# Altium PCB TIDA-010056.PcbDoc (part 4 of 4)
Units mil, origin at the board's own origin, x right, y up, seen from the top; angles counter-clockwise.
Board outline 2716.54 x 2756 mil, 4 copper layers (Top Layer, GND, PWR, Bottom Layer), stack 63.2 mil thick; 152 components, 93 nets, 418 pads, 601 vias.
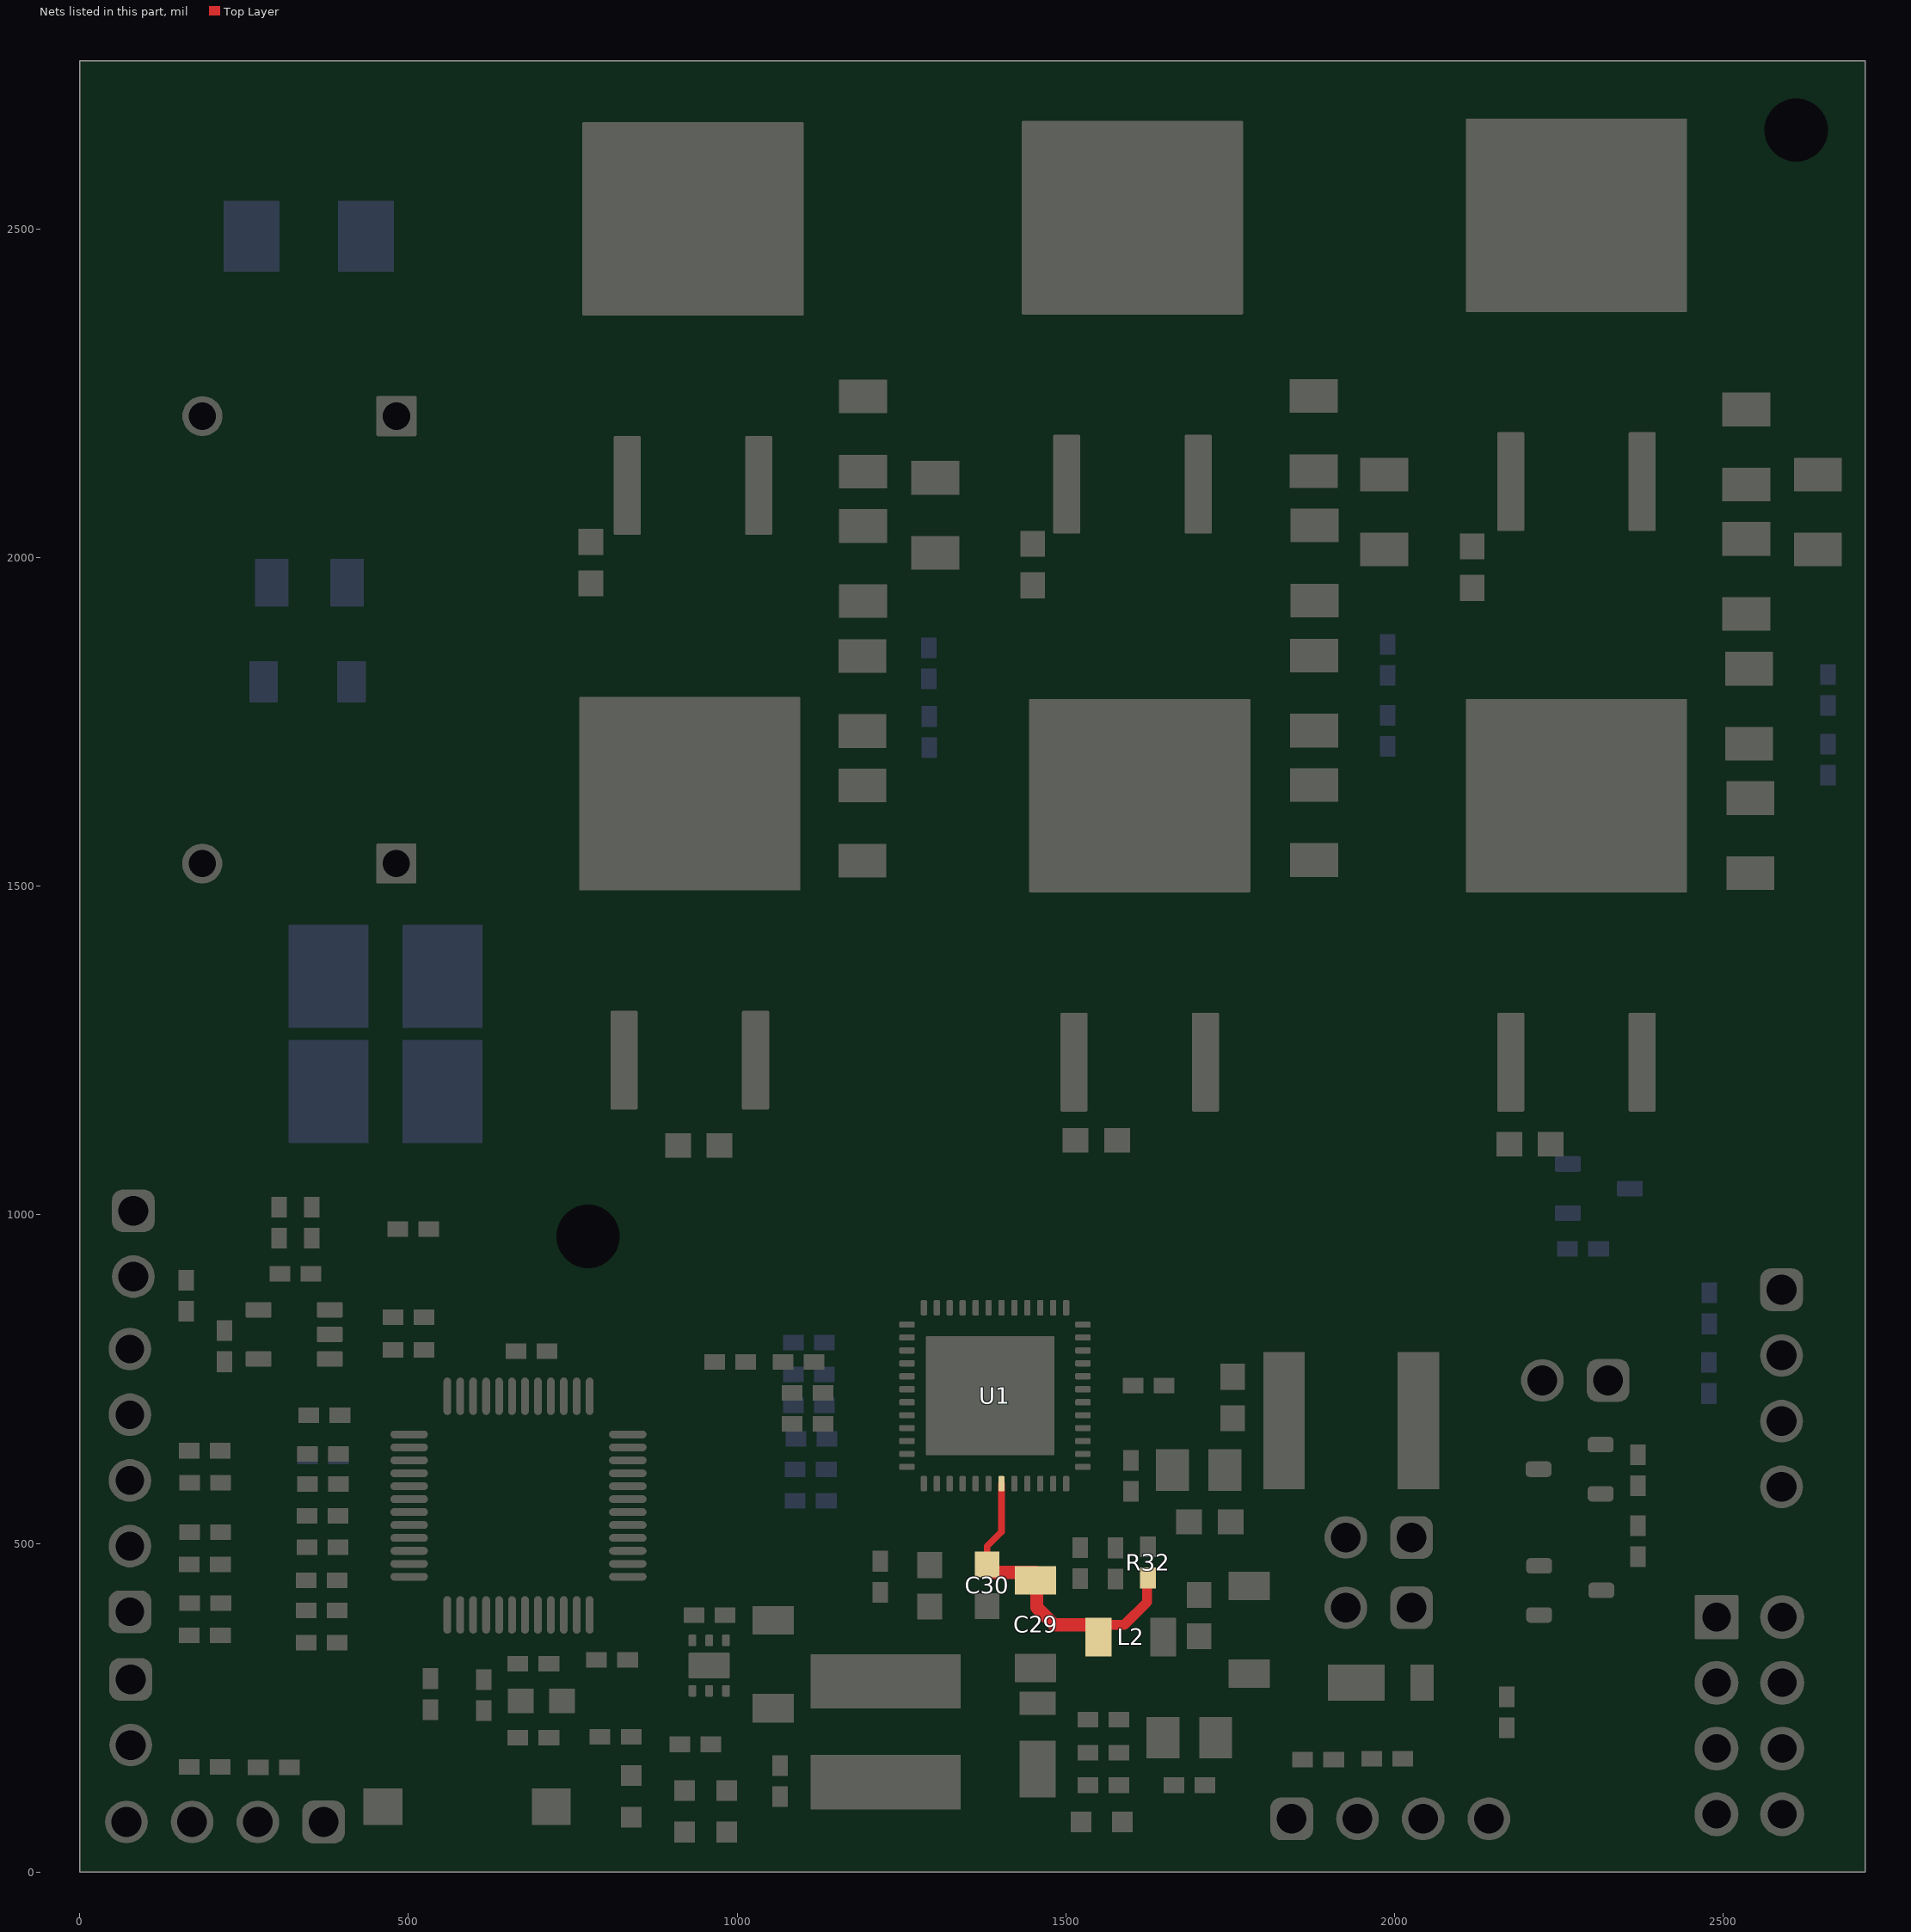
[diagram p5: the nets of this part, all layers, seen from the top]

## Via types
v1: diameter 24, hole 12, Top Layer to Bottom Layer, 476 vias
v2: diameter 20, hole 10, Top Layer to Bottom Layer, tented both sides, 108 vias
v3: diameter 19.68, hole 7.87, Top Layer to Bottom Layer, 14 vias
v4: diameter 200, hole 100, Top Layer to Bottom Layer, 3 vias

## Nets (pads, with @x,y where several pads share a name; then routed paths per layer and width w, separated by ;. In a path a pad name is that pad's centre, name@x,y a point inside that pad or via, vN(x,y) a via of type N, cw(c..) or ccw(c..) an arc to the next point about the centre after c; other vN are vias at no path point) (continued)
VIN: C29.1 C30.1 L2.2 R32.1 U1.43 | length 517.1
  Top Layer w10: C30.1@1380.47,467.69 1380.47,495.47 1402.13,517.13 U1.43@1402.13,590.82 ; R32.1@1623.84,445.88 R32.1@1623.84,447.87
  Top Layer w15: L2.2@1549.79,357.49 1549.79,376 1589,376 1623.84,410.84 R32.1@1623.84,445.88
  Top Layer w20: C30.1@1375.77,466.4 C30.1@1378.76,469.39 ; C30.1@1380.47,467.69 1392.16,456 1454,456 C29.1@1454,443.93 ; C29.1@1455.87,443.93 1455.87,402.62 1482.49,376 L2.2@1549.79,376
pads on no net: H1. H2. U1.12 U1.13 U1.22 U1.23 U1.24 U1.25 U1.26 U1.49@1323.08,666.41 U1.49@1323.08,724.68 U1.49@1323.08,782.94 U1.49@1384.89,666.41 U1.49@1384.89,724.68 U1.49@1384.89,782.94 U1.49@1446.7,666.41 U1.49@1446.7,724.68 U1.49@1446.7,782.94 U2.1 U2.2 U2.8 U2.10 U2.11 U2.16 U2.27 U2.28 U2.38 U2.40 U2.41 U2.44 U2.48 U3.2 U3.5

## Polygon pours and split planes (outlines as drawn)
GND on GND "GND-GND" (solid, pour order 4): 25.16,1022.16 46.65,1043 2639,1043 2674,1008 2674,59 2641,26 66,26 25.16,66.84
VDC on GND "Top Layer-VM" (solid, remove dead copper, pour order 84): 654,1485 678.9,1509.9 678.9,2252.58 730.31,2304 2667.11,2304 2683.13,2320.01 2683.13,2544.87 2505,2723 405,2723 376,2694 376,1575 466,1485
SHB on GND "GND-SHB" (solid, pour order 96): 1940.93,1485.99 1974.45,1519.51 1974.45,2213.51 1938.97,2248.99 1435.93,2248.99 1406.45,2219.52 1406.45,1520.2 1440.65,1485.99
SHA on GND "GND-SHA" (solid, pour order 100): 2632.98,1485.05 2664.45,1516.52 2664.45,2227.52 2643.91,2248.05 2076.98,2248.05 2037.45,2208.52 2037.45,1517.52 2069.92,1485.05
SHC on GND "GND-SHC" (solid, pour order 104): 1314.96,1486.02 1344.45,1515.51 1344.45,2218.44 1313.86,2249.02 787.96,2249.02 760.45,2221.52 760.45,1522.72 797.15,1486.02
GND on GND "Top Layer-GND" (solid, pour order 110): 419.26,1096 441,1110.29 441,1440 324,1557 324,2690 296,2718 49.82,2718 34,2702.18 34,1117 55,1096
SLA on GND "GND-SLA" (solid, pour order 116): 2654.78,1094.84 2679,1119.07 2679,1423.13 2660.13,1442 492.76,1442 488.5,1437.74 488.5,1108.6 502.26,1094.84
GND on GND "GND-GND 1" (solid, pour order 130): 34.69,1186.2 64.53,1216.04 64.53,1217.96 350.55,1217.96 383.45,1185.05 383.45,951.88 365.53,933.96 60.53,933.96 34.69,959.8
SHC on PWR "GND-SHC" (solid, pour order 172): 1318.96,1490.02 1348.45,1519.51 1348.45,2222.44 1317.86,2253.02 791.96,2253.02 764.45,2225.52 764.45,1526.72 801.15,1490.02
SHA on PWR "GND-SHA" (solid, pour order 170): 2636.98,1489.05 2668.45,1520.52 2668.45,2231.52 2647.91,2252.05 2080.98,2252.05 2041.45,2212.52 2041.45,1521.52 2073.92,1489.05
SHB on PWR "GND-SHB" (solid, pour order 168): 1944.93,1489.99 1978.45,1523.51 1978.45,2217.51 1942.97,2252.99 1439.93,2252.99 1410.45,2223.52 1410.45,1524.2 1444.65,1489.99
3.3V on PWR "PWR-3.3V" (solid, pour order 6): 36.87,822.35 63.52,849 988,849 1015.3,821.7 1015.3,52.3 992,29 63,29 20.51,71.49
VDC on PWR "Top Layer-VM" (solid, remove dead copper, pour order 86): 654.38,1485 679,1509.62 679,2253 730,2304 2667.11,2304 2681,2317.89 2681,2540 2498,2723 405,2723 376,2694 376,1575.57 466.57,1485
GND on PWR "Top Layer-GND" (solid, pour order 112): 419.26,1096 441,1110.29 441,1440 323,1558 323,2691 296,2718 49.82,2718 34,2702.18 34,1117 55,1096
SLA on PWR "PWR-SLA" (solid, pour order 118): 2662,1169 2679.95,1186.95 2679.95,1420.03 2657.98,1442 613,1442 597,1426 597,1185 613,1169
SLA on Bottom Layer "Bottom Layer-SLA" (solid, pour order 72): 2645.84,1094.84 2658,1107 2658,1432 2648,1442 492.76,1442 488.5,1437.74 488.5,1108.6 502.26,1094.84
VDC on Bottom Layer "Top Layer-VM" (solid, remove dead copper, pour order 88): 657.59,1485 679,1506.41 679,2254 729,2304 2667.11,2304 2682,2318.89 2682,2536 2495,2723 405,2723 376,2694 376,1570 461,1485
SHB on Bottom Layer "Bottom Layer-SHB" (solid, pour order 90): 1887.45,1496.52 1918.45,1527.51 1918.45,2226.52 1895.97,2248.99 1438.93,2248.99 1416.45,2226.51 1416.45,1523.52 1443.45,1496.51
SHA on Bottom Layer "Bottom Layer-SHA" (solid, pour order 92): 2580.45,1495.52 2602.45,1517.52 2602.45,2222.52 2580.45,2244.52 2091.45,2244.52 2061.45,2214.52 2061.45,1535.02 2100.96,1495.51
SHC on Bottom Layer "Bottom Layer-SHC" (solid, pour order 108): 1193.03,1495.51 1232.71,1535.19 1232.71,2219.26 1206.45,2245.51 787.52,2245.52 765.44,2223.44 765.47,1522.5 792.45,1495.52
GND on Bottom Layer "Top Layer-GND" (solid, pour order 114): 419.26,1096 441,1110.29 441,1433 324,1550 324,2689.38 295.38,2718 49.82,2718 34,2702.18 34,1117 55,1096
SLA on Bottom Layer "Bottom Layer-SLA 1" (solid, pour order 126): 2230.33,1026.88 2256.53,1000.69 2363.08,1000.69 2386.79,1024.39 2386.79,1159.01 2381.8,1164 2253.33,1164 2229.52,1140.19
GND on Bottom Layer "GND-GND" (solid, pour order 44): 25.16,1022.16 46.65,1043 2639,1043 2674,1008 2674,59 2641,26 66,26 25.16,66.84
GND on Bottom Layer "Bottom Layer-GND" (solid, pour order 128): 35.16,1183.24 65,1213.09 65,1215 351.02,1215 383.92,1182.1 383.92,948.92 366,931 61,931 35.16,956.84
VDC on Top Layer "Top Layer-SHB" (solid, pour order 174): 2677.13,2113.01 2683.13,2119.01 2683.13,2320.02 2678.13,2325.01 2616.13,2325.01 2611.38,2320.26 2611.38,2119.08 2617.45,2113.01
SHA on Top Layer "SHA_L01_P166" (solid, remove dead copper, pour order 166): 2118.02,1483.02 2447.21,1483.02 2462.07,1497.88 2462.07,2232.97 2449.01,2246.02 2258.96,2246.02 2236.45,2223.52 2237.45,2222.52 2237.45,2028.52 2186.45,1977.52 2109.94,1977.52 2099.45,1967.02 2099.45,1497.02
SHB on Top Layer "SHB_L01_P164" (solid, remove dead copper, pour order 164): 1449.02,1483.02 1778.21,1483.02 1793.07,1497.88 1793.07,2232.97 1778.04,2248 1591.93,2248 1567.45,2223.52 1568.45,2222.52 1568.45,2028.52 1517.45,1977.52 1440.94,1977.52 1430.45,1967.02 1430.45,1497.02
SHC on Top Layer "SHC_L01_P162" (solid, remove dead copper, pour order 162): 767.02,1486.02 1096.21,1486.02 1111.07,1500.88 1111.07,2235.97 1098.01,2249.02 907.96,2249.02 885.45,2226.52 886.45,2225.52 886.45,2031.52 838.45,1983.52 761.94,1983.52 750.45,1972.02 750.45,1498.52
GND on Top Layer "GND_L01_P160" (solid, remove dead copper, pour order 160): 1392.27,256.62 1412,239 1485,239 1485,333 1482,336 1453,336 1399.17,389.83 1399.17,424 1398.17,425 1363,425 1361,423 1361,369 1392.27,332
SLA on Top Layer "SLA_L01_P158" (solid, remove dead copper, pour order 158): 2613.45,2033.59 2682.85,2033.59 2683.13,1391.2 2672.71,1380.78 2523.77,1380.78 2505.45,1399.09 2505.45,1559.52 2516.71,1570.77 2589.71,1570.78 2613.45,1594.52
SLA on Top Layer "SLA_L01_P156" (solid, remove dead copper, pour order 156): 1948.45,2023.52 1958.52,2033.59 2000.62,2033.59 2008.45,2025.76 2008.45,1412.52 1987.45,1391.52 1854.45,1391.52 1841.45,1404.52 1841.45,1566.52 1856.45,1581.51 1928.03,1581.52 1948.45,1601.93
SLA on Top Layer "SLA_L01_P154" (solid, remove dead copper, pour order 154): 1265.13,2026.26 1271.46,2032.59 1331.38,2032.59 1339.45,2024.52 1339.45,1395.52 1334.45,1390.52 1175.45,1390.52 1138.45,1427.52 1138.45,1566.52 1152.45,1580.51 1246.28,1580.52 1265.13,1599.37
VDC on Top Layer "Top Layer-SHB" (solid, pour order 152): 1332.45,2098.01 1338.45,2104.01 1338.45,2313.52 1334.45,2317.52 1270.45,2317.51 1265.13,2312.2 1265.13,2105.65 1272.77,2098.01
VDC on Top Layer "Top Layer-SHB" (solid, pour order 148): 2014.77,2100.86 2020.77,2106.86 2020.76,2307.86 2015.77,2312.86 1953.77,2312.86 1949.02,2308.11 1949.02,2106.92 1955.08,2100.86
SHC on Top Layer "Top Layer-SHB" (solid, pour order 146): 1213.45,1824.35 1227.45,1838.35 1227.45,1948.79 1216.88,1959.35 1095.45,1959.35 1084.45,1948.35 1084.45,1831.99 1092.08,1824.35
SHA on Top Layer "Top Layer-SHB" (solid, pour order 144): 2561.44,1805.25 2575.44,1819.25 2575.44,1929.68 2564.87,1940.25 2443.44,1940.25 2432.44,1929.25 2432.44,1812.88 2440.07,1805.25
GND on Top Layer "Bottom Layer-GND" (solid, pour order 136): 33.26,1198.74 63.11,1228.58 63.11,1230.49 349.12,1230.49 442,1137.61 442,972 416.49,946.49 59.11,946.49 33.26,972.33
GND on Top Layer "GND-GND" (solid, pour order 134): 40.42,936.64 82.03,977 1189,977 1271.79,894.21 1271.79,455.48 857.07,40.76 81.26,40.76 40.42,81.6
SLA on Top Layer "Top Layer-SLA" (solid, pour order 132): 901.13,1424.51 917.77,1441.15 1323.5,1441.15 1340.13,1424.51 1340.13,1162.51 1328.77,1151.15 913.78,1151.15 901.13,1163.8
VDC on Top Layer "Top Layer-VM" (solid, remove dead copper, pour order 30): 617,1485 665.6,1533.6 665.6,2240.6 729,2304 2667.11,2304 2682.85,2319.74 2682.85,2540.15 2500,2723 405,2723 376,2694 376,1560 451,1485
GND on Top Layer "Top Layer-GND" (solid, pour order 32): 419.26,1096 441,1110.29 441,1426.09 323,1544.09 323,2691 296,2718 49.82,2718 34,2702.18 34,1117 55,1096
SLA on Top Layer "Top Layer-SLA" (solid, pour order 46): 2237.45,1428.52 2248.45,1439.51 2660.46,1439.52 2679.95,1420.03 2679.95,1157.03 2668.43,1145.51 2244.48,1145.52 2237.45,1152.55
SHB on Top Layer "Top Layer-SHB" (solid, pour order 34): 1900.45,1825.51 1914.45,1839.51 1914.45,1949.95 1903.88,1960.51 1782.45,1960.52 1771.45,1949.52 1771.45,1833.15 1779.08,1825.52
SLA on Top Layer "Top Layer-SLA" (solid, pour order 120): 1581.45,1430.15 1593.3,1442 1999.36,1442 2014.45,1426.91 2014.45,1169.51 1996.93,1152 1598.96,1152 1581.45,1169.52
SLA on Top Layer "Top Layer-SLA" (solid, pour order 124): 595.9,1434.9 603,1442 659.34,1442 663,1438.34 663,1148 654,1139 607,1139 595.9,1150.1
no net on Bottom Solder "Bottom Layer-SLA" (solid, pour order 176): 2645.84,1094.84 2658,1107 2658,1432 2648,1442 492.76,1442 488.5,1437.74 488.5,1108.6 502.26,1094.84
GND on Bottom Solder "Top Layer-GND" (solid): 419.26,1096 441,1110.29 441,1440 324,1557 324,2690 296,2718 49.82,2718 34,2702.18 34,1117 55,1096
VDC on Bottom Solder "Top Layer-VM" (solid): 2683,2545 2555.06,2545 2482.34,2617.72 2482.34,2723 405,2723 376,2694 376,1575.07 466.07,1485 655.1,1485 678,1507.9 678,2251.77 730.23,2304 2667.11,2304 2683,2319.89

## Keep-outs
Keep-Out Layer:
  circle w6: c2611.37,2650.8 r83.5
  lines w6: 2425.85,15 2425.94,15.09 ; 2701.54,15 15,15 15,2741 2701.54,2741 2701.54,15.09
  text ".Layer_Name" at -885.15,-1620.64 h60

## Other copper
Top Layer:
  pour cut-out: 286,1067.71 287.78,1070 348.58,1070 353,1065.58 353,992 352,991 289.99,991 286,994.61
  region: 1115.9,1873.73
  region net GND: 2005.19,791.54 2013.19,799.54 2110.19,799.54 2116.19,793.54 2116.19,582.57 2111.15,577.54 2009.84,577.54 2005.19,582.19
  text ".layer_Name" at -870.15,-1610.15 h60
GND:
  pour cut-out: 1384,1394 1398.8,1408.8 1398.8,1436.2 1382,1453 1340,1453 1322.76,1435.76 1322.76,1412.2 1340.96,1394
  pour cut-out: 1887.13,318.5 2087.34,318.5 2122.34,353.5 2122.34,551.5 2099.34,574.5 1877.57,574.5 1850.34,547.27 1850.34,358.12
  pour cut-out: 2142.2,694 2181.2,655 2369.2,655 2408.2,694 2408.2,793.79 2368,834 2178.2,834 2142.2,798
  pour cut-out: 287.85,1082.95 291,1087 347.56,1087 351.98,1082.58 351.98,1037.42 348.56,1034 291.34,1034 287.85,1037.17
  text "GND" at -850.15,-1620.15 h60
PWR:
  pour cut-out: 1384.14,1393.9 1398.93,1408.7 1398.93,1436.1 1382.14,1452.9 1340.14,1452.9 1322.9,1435.66 1322.9,1412.1 1341.1,1393.9
  text "PWR" at -812.15,-1627.15 h60
Bottom Layer:
  pour cut-out: 1384,1394 1398.8,1408.8 1398.79,1436.2 1382,1453 1340,1453 1322.76,1435.76 1322.76,1412.2 1340.96,1394
  pour cut-out: 2463.65,710.47 2469.49,704.64 2530.06,704.64 2534.65,709.23 2534.65,857.47 2527.89,864.23 2467.89,864.23 2463.65,859.98
  pour cut-out: 1879.79,324 2080,324 2115,359 2115,557 2092,580 1870.23,580 1843,552.77 1843,363.62
  pour cut-out: 2142,694 2223.39,612.61 2455.61,612.61 2534.65,691.65 2534.65,783.35 2484,834 2178,834 2142,798
  pour cut-out: 287.57,1082.95 290.72,1087 347.28,1087 351.7,1082.58 351.7,1037.42 348.28,1034 291.07,1034 287.57,1037.17
  text ".Layer_Name" at -811.15,-1620.15 h60
Multi-Layer:
  pour cut-out: 716.95,1060.58 827.05,1060.58 869.14,1018.5 869.14,891.83 857.05,879.74 705.24,879.74 673.98,911 673.98,1041.84 693.14,1061
  pour cut-out: 2482.34,2735.87 2482.34,2617.72 2554.77,2545.28 2752.41,2545.28

## Silkscreen, mask and mechanical layers (free items; w line width, h text height)
Top Overlay:
  lines w6: 310,270 310,308 ; 640.98,347 653,347 653,339 ; 877,226.39 877,159.11 888.79,147.32 ; 1086.65,89.13 1094.37,81.42 ; 1531.08,533 1534.08,530 1542.57,530 1553.82,518.75 ; 1577.55,541 1585.72,541 1608,518.72 ; 1606.4,203.19 1606.4,252.4 1619,265 1636.5,265 1645.5,274 ; 1611,121.38 1618.14,121.38 1649,90.52 ; 310,308 310.97,308 317,301.97 303.97,301.97 310,308
  text "VDC" at 523,2683 h25
  text "GND" at 134,2682 h25
  text "PHC" at 814.41,1796.52 h25
  text "PHB" at 1486.45,1796.52 h25
  text "PHA" at 2172.45,1792.52 h25
  text "LED" at 880,10 h25
  text "3.3V" at 758,9 h25
  text "FAULT" at 978,9 h25
  text ".layer_Name" at -844.15,-1608.15 h60
Bottom Overlay:
  circle w6: c2226,997.45 r8.45
  text "GND" at 7,974 h25 r270
  text "DIR" at 8,875 h25 r270
  text "3.3V" at 8,760 h25 r270
  text "GND" at 9,662 h25 r270
  text "HC" at 7,574 h25 r270
  text "HB" at 5,479 h25 r270
  text "HA" at 6,370 h25 r270
  text "RX" at 5,270 h25 r270
  text "TX" at 4,166 h25 r270
  text "3.3V" at 100,10 h25
  text "GND" at 402,9 h25
  text "GND" at 1875,9 h25
  text "RST" at 305,8 h25
  text "POT" at 1970,8 h25
  text "3.3V" at 2084,8 h25
  text "TEST" at 214,7 h25
  text "ON" at 2173,7 h25
  text ".Layer_Name" at -885.15,-1620.64 h60
Top Paste:
  text ".Layer_Name" at -897.15,-1623.64 h60
Bottom Paste:
  text ".Layer_Name" at -897.15,-1623.64 h60
Top Solder:
  text ".Layer_Name" at -869.15,-1631.15 h60
Bottom Solder:
  pour cut-out: 2456.63,1133.52 2318.63,1133.52 2259.63,1074.52 2657.45,1074.52 2676.45,1093.51 2676.45,1139.51 2523.63,1139.52 2517.21,1133.09 2471.63,1133.09
  text ".Layer_Name" at -822.15,-1627.15 h60
M1 Board Outline:
  the board outline again, w6
M2 Board Dimensions:
  rectangle: -867.65,-767.15 -492.65,-642.15
  rectangle: -992.65,-642.15 -867.65,-517.15
  lines w7: -992.65,-642.15 7.35,-642.15 ; -867.65,-767.15 -867.65,-517.15 ; -742.65,-767.15 -742.65,-517.15 ; -492.65,-767.15 -492.65,-517.15 ; -242.65,-767.15 -242.65,-517.15 ; -992.65,-767.15 -992.65,-517.15 7.35,-517.15 7.35,-767.15 -992.65,-767.15
  lines w10: -992.65,-832.15 -992.65,-812.15 ; -932.65,-842.15 -992.65,-822.15 ; -932.65,-802.15 -992.65,-822.15 ; -768.57,-822.15 -992.65,-822.15 ; -216.73,-822.15 7.35,-822.15 ; -52.65,-842.15 7.35,-822.15 ; -52.65,-802.15 7.35,-822.15 ; 7.35,-832.15 7.35,-812.15
  text "1000 (mil)" at -758.57,-858.14 h60
M3 3D STEP Top:
  text ".Layer_Name" at -885.15,-1620.64 h60
M4 3D STEP Bottom:
  text ".Layer_Name" at -885.15,-1620.64 h60
M5 Assembly Top:
  circle w6: c2279.29,575 r6.71
  circle w6: c2253.29,465.8 r6.71
  circle w6: c2324.16,744.81 r15
  circle w6: c2033.16,396.7 r15
  circle w6: c2029.16,499.81 r15
  circle w6: c342,781 r6.71
  circle w6: c71.16,288.81 r15
  circle w6: c71.16,395.81 r15
  circle w6: c370,78 r15
  circle w10: c74,1013 r19.24
  circle w10: c1822.75,77.83 r19.24
  lines w8: -1754.15,-1692.32 4845.85,-1692.32 ; -1754.15,-1488.98 4847.85,-1488.98 ; -1754.15,-1285.65 -1754.15,-1895.65 2250.85,-1895.65 4847.85,-1895.65 4847.85,-1285.65 -1753.65,-1285.65 -1753.65,-1895.65 ; 710.85,-1895.65 710.85,-1285.65 ; 1977.85,-1488.98 1977.85,-1285.65 ; 2817.85,-1488.98 2817.85,-1285.65 ; 3439.85,-1902.15 3439.85,-1699.32
  text "COMPONENTS MARKED 'DNP' SHOULD NOT BE POPULATED." at -308.65,-1080.65 h20
  text "ASSEMBLY VARIANT:" at -309.15,-1196.15 h20
  text ".VariantName" at 726.85,-1196.15 h20
  text "ALL ARTWORK VIEWED FROM TOP SIDE" at -1690.65,-1417.82 h20
  text "BOARD #:" at 785.85,-1417.82 h20
  text ".PRJ_Number" at 1331.35,-1417.82 h20
  text "REV:" at 2175.85,-1417.82 h20
  text ".PCB_Rev" at 2467.35,-1417.82 h20
  text "SVN REV:" at 3013.85,-1417.82 h20
  text ".VersionControl_RevNumber" at 3519.85,-1417.82 h20
  text ".layer_Name" at -927.15,-1600.15 h20
  text "LAYER NAME =" at -1697.15,-1607.15 h20
  text ".TID" at 1181,-1617 h20
  text "TID #:" at 774.85,-1623.82 h20
  text ".plot_File_Name" at -1699.15,-1796.15 h20
  text "GENERATED    :" at 787.85,-1826.49 h20
  text ".Print_Date" at 1657.35,-1826.49 h20
  text ".Print_Time" at 2386.35,-1826.49 h20
  text "TEXAS INSTRUMENTS" at 3650.85,-1826.49 h20
M6 Assembly Bottom:
  circle w6: c2298,1001 r7.07
  lines w6: -1754.65,-1489.48 4847.35,-1489.48 ; -1752.65,-1692.82 4847.35,-1692.82 ; 275.35,-1489.48 275.35,-1286.15 ; 2382.35,-1896.15 2382.35,-1286.15 ; 3271.35,-1896.15 4846.85,-1896.15 4846.85,-1286.15 -1754.65,-1286.15 -1754.65,-1896.15 842.35,-1896.15 4847.35,-1896.15 4847.35,-1286.15
  text "COMPONENTS MARKED 'DNP' SHOULD NOT BE POPULATED." at 4639.85,-1080.15 h20
  text ".VariantName" at 3595.85,-1196.15 h20
  text "ASSEMBLY VARIANT:" at 4634.85,-1196.15 h20
  text "SVN REV:" at 79.35,-1418.32 h20
  text ".PCB_Rev" at 625.85,-1418.32 h20
  text "REV:" at 917.35,-1418.32 h20
  text ".PRJ_Number" at 1761.85,-1418.32 h20
  text "BOARD #:" at 2307.35,-1418.32 h20
  text "PCB VIEWED FROM BOTTOM SIDE" at 4783.85,-1418.32 h20
  text ".TID" at 1908,-1601 h20
  text "LAYER NAME =" at 4778.85,-1603.15 h20
  text "TID #:" at 2314.15,-1607.82 h20
  text ".Layer_Name" at 4005.85,-1610.15 h20
  text ".Print_Time" at 706.85,-1826.99 h20
  text ".Print_Date" at 1435.85,-1826.99 h20
  text "GENERATED    :" at 2305.35,-1826.99 h20
  text ".plot_File_Name" at 3978.35,-1826.99 h20
  text "PLOT NAME =" at 4783.85,-1826.99 h20
M9 Title Sheet:
  drawing of 57 lines, arcs and shapes, not listed
  text "1" at -722.31,7274.35 h70
  text "2" at 1773.35,7274.35 h70
  text "3" at 4262.69,7274.35 h70
  text "4" at 6769.36,7274.35 h70
  text "5" at 9268.35,7274.35 h70
  text "6" at 11773.35,7274.35 h70
  text "A" at -1878.65,6131.35 h70
  text "A" at 12921.35,6131.35 h70
  text "B" at -1878.65,3751.35 h70
  text "B" at 12921.35,3751.35 h70
  text "C" at -1878.65,1376.35 h70
  text "C" at 12921.35,1376.35 h70
  text "PROJECT TITLE:" at 9881.35,-484.65 h45
  text ".PRJ_Title" at 10033.85,-619.15 h50
  text "DESIGNED FOR:" at 9881.35,-785.65 h45
  text ".PRJ_Customer" at 9931.35,-925.65 h70
  text "D" at -1878.65,-993.65 h70
  text "D" at 12921.35,-993.65 h70
  text "FILE NAME:" at 9881.35,-1085.65 h45
  text ".PCB_File_Name_No_Path" at 9931.35,-1205.65 h70
  text "Texas Instruments (TI) and/or its licensors do not warrant the accuracy or completeness of this specification" at 4911.85,-1367.49 h45
  text "ENGINEER:" at 9881.35,-1375.65 h45
  text "LAYOUT BY:" at 11386.35,-1375.65 h45
  text "or any information contained therein. TI and/or its licensors do not warrant that this design will meet" at 4866.86,-1480.15 h45
  text ".PRJ_Engineer" at 9931.35,-1530.64 h70
  text ".PCB_Layout" at 11436.85,-1530.64 h70
  text "the specifications, will be suitable for your application or fit for any particular purpose, or will operate in" at 4866.86,-1592.82 h45
  text "ALTIUM DESIGNER VERSION:" at 11386.35,-1685.65 h45
  text "an implementation. TI and/or its licensors do not warrant that the design is production worthy. You should" at 4866.86,-1705.48 h45
  text "completely validate and test your design implementation to confirm the system functionality for your application." at 4911.85,-1818.15 h45
  text ".print_Scale" at 9931.35,-1818.98 h70
  text ".Application_BuildNumber" at 11436.85,-1818.98 h70
  text "2" at 1773.35,-2025.65 h70
  text "3" at 4262.69,-2025.65 h70
  text "4" at 6769.36,-2025.65 h70
  text "5" at 9268.35,-2025.65 h70
  text "6" at 11773.35,-2025.65 h70
M10 Fab Notes:
  drawing of 228 lines, arcs and shapes, not listed
  text "DESIGN INFORMATION" at 10918.87,6047.85 h60
  text "(REFER ALSO ARRAY/PANEL PROFILING INFORMATION)" at 10557.31,5886.14 h60
  text "BOARD SIZE" at 9871.31,5881.85 h60
  text "69mm" at 10333.63,5754.03 h60
  text "X" at 10839.31,5754.03 h60
  text "70mm" at 11070.63,5754.03 h60
  text "Number of Layers :" at 10274.31,5556.85 h60
  text "4" at 11369.12,5546.85 h60
  text "MIN. TRACK WIDTH:" at 10274.31,5417.85 h60
  text "8" at 11370.55,5417.85 h60
  text "MIL" at 11525.31,5417.85 h60
  text "MIN. CLEARANCE:" at 10274.31,5285.85 h60
  text "MIL" at 11525.31,5285.85 h60
  text "7" at 11330.85,5282.85 h60
  text "MIN. VIA DRILL SIZE:" at 10274.31,5153.85 h60
  text "MIL" at 11525.31,5153.85 h60
  text "7.87" at 11270.85,5150.85 h60
  text "5.91 MIL" at 10969.31,5012.14 h60
  text "MINIMUM ANNULAR RING" at 9945.08,5007.86 h60
  text "EXTERNAL" at 11677.31,5007.86 h60
  text "PER" at 10145.08,4889.85 h60
  text "IPC-D-275 CLASS 2 LEVEL C" at 10365.08,4889.85 h60
  text "MIL, HOLES" at 11853.31,4777.56 h60
  text "+/-" at 11460.85,4776.85 h60
  text "+/-" at 12314.85,4776.85 h60
  text "REGISTRATION TOLERANCES:" at 9945.08,4771.85 h60
  text "METAL" at 11144.85,4771.85 h60
  text "5" at 11721.05,4771.85 h60
  text "3" at 12554.05,4771.85 h60
  text "MIL" at 12670.31,4771.85 h60
  text "MATERIAL:" at 9870.31,4562.39 h60
  text "FR-4 High Tg" at 10856.75,4422.06 h60
  text "X" at 10696.85,4414.85 h60
  text "FR-408" at 10291.31,4413.49 h60
  text "OTHER" at 11779.31,4413.49 h60
  text "63 MIL (1.6mm) +/-10%" at 10611.41,4250.77 h60
  text "THICKNESS:" at 9945.08,4246.49 h60
  text "X" at 10483.25,4246.49 h60
  text "OTHER" at 11896.31,4246.49 h60
  text "TOLERANCE:" at 9945.08,4088.49 h60
  text "X" at 10784.38,4088.49 h60
  text "ANSI IPC-6012 TYPE 3 CLASS 2" at 10971.33,4088.49 h60
  text "OTHER +/-" at 10971.31,3932.49 h60
  text "BOW & TWIST:" at 9945.08,3775.49 h60
  text "X" at 10784.38,3775.49 h60
  text "ANSI IPC-6012 TYPE 3 CLASS 2" at 10971.33,3775.49 h60
  text "OTHER +/-" at 10971.31,3616.98 h60
  text "COPPER THICKNESS (FINISHED):" at 9870.31,3481.49 h60
  text "1.4MIL (1oz)" at 10750.31,3328.77 h60
  text "2MIL (1.4oz)" at 11517.31,3328.77 h60
  text "2.8MIL (2oz)" at 12244.31,3328.77 h60
  text "X" at 12111.85,3326.85 h60
  text "OUTER:" at 10227.31,3324.49 h60
  text "1.4MIL (1oz)" at 10750.31,3171.77 h60
  text "2.8MIL (2oz)" at 11517.31,3171.77 h60
  text "N/A" at 12243.85,3172.14 h60
  text "X" at 11400.85,3168.85 h60
  text "INNER SIGNAL:" at 9938.23,3167.49 h60
  text "DRILLING:" at 9870.31,3028.49 h60
  text "REFERENCE:" at 9945.08,2911.49 h60
  text "X" at 10593.31,2911.49 h60
  text "AS SHOWN" at 10780.31,2911.49 h60
  text "X" at 11494.31,2911.49 h60
  text "NC_DRILL FILES" at 11631.31,2911.49 h60
  text "PTH MIN COPPER THICKNESS:" at 9945.08,2753.49 h60
  text "X" at 11295.31,2753.49 h60
  text "1MIL" at 11432.31,2753.49 h60
  text "OTHER" at 11929.31,2753.49 h60
  text "BOARD FINISH:" at 9870.31,2594.49 h60
  text "SILKSCREEN:" at 10025.53,2476.49 h60
  text "X" at 10974.31,2476.49 h60
  text "TOP" at 11100.31,2476.49 h60
  text "X" at 11484.31,2476.49 h60
  text "BOTTOM" at 11611.31,2476.49 h60
  text "SILKSCREEN COLOR:" at 10025.53,2309.49 h60
  text "X" at 10973.27,2309.49 h60
  text "WHITE" at 11100.31,2309.49 h60
  text "OTHER" at 11611.31,2309.49 h60
  text "SOLDER RESIST COLOR:" at 10025.53,2139.49 h60
  text "X" at 10593.27,1980.29 h60
  text "GREEN" at 10720.31,1980.29 h60
  text "BLUE" at 11311.31,1980.29 h60
  text "OTHER" at 11849.31,1980.29 h60
  text "IMMERSION GOLD (ENIG)" at 10931.31,1791.77 h60
  text "ENEPIG" at 12268.85,1788.49 h60
  text "SURFACE FINISH:" at 9870.31,1787.49 h60
  text "X" at 10744.36,1787.49 h60
  text "IMM. TIN/SILVER OR EQUIV" at 10199.85,1630.49 h60
  text "OTHER" at 11631.31,1630.49 h60
  text "ARRAY/PANEL:" at 9870.31,1451.49 h60
  text "CUT AND TRIM PER MECH LAYER 1" at 10931.31,1447.2 h60
  text "N.C. ROUTE" at 10931.31,1295.49 h60
  text "X" at 11610.31,1295.49 h60
  text "V. SCORE" at 11797.31,1295.49 h60
  text "CERTIFICATION:" at 9870.31,1158.49 h60
  text "MATERIALS AND WORKMANSHIP FOR ALL PCBS" at 10595.31,1158.49 h60
  text "TO MEET OR EXCEED THE REQUIREMENTS OF:" at 10595.31,1060.49 h60
  text "X" at 10221.81,923.99 h60
  text "ANSI IPC-A-600F CLASS ->" at 10360.81,923.99 h60
  text "X" at 11999.87,923.99 h60
  text "2" at 12118.81,923.99 h60
  text "1" at 11803.81,922.49 h60
  text "3" at 12472.81,922.49 h60
  text "X" at 10223.87,764.49 h60
  text "UL 94V-0" at 10360.81,764.49 h60
  text "X" at 11035.87,764.49 h60
  text "RoHS" at 11172.81,764.49 h60
  text "OTHER" at 11817.21,764.49 h60
  text "PER ORDER" at 12214.27,764.49 h60
  text "VIA TENTING:" at 11087.85,630.85 h60
  text "X" at 11846.31,626.49 h60
  text "ADDITIONAL REQUIREMENTS:" at 9870.31,623.49 h60
  text "YES" at 11637.52,621.77 h60
  text "NO" at 12002.32,616.54 h60
  text "MICROSECTION:" at 9945.08,508.49 h60
  text "YES" at 10850.81,508.49 h60
  text "IMPEDANCE CONTROL:" at 11109.85,501.85 h60
  text "YES" at 12093.85,500.85 h60
  text "X" at 12635.85,493.85 h60
  text "NO" at 12469.32,483.54 h60
  text "REQUIRED" at 11712.31,352.35 h60
  text "BARE BOARD ELEC. TEST:" at 9945.08,349.49 h60
  text "NONE" at 11250.81,349.49 h60
  text "X" at 11585.31,349.49 h60
  text "PER ORDER" at 12304.31,349.49 h60
  text "NOTE :" at 3369,271 h60
  text "MANUFACTURER'S UL:" at 9945.08,192.49 h60
  text "RAIL" at 11110.81,188.2 h60
  text "METAL" at 11602.62,188.2 h60
  text "X" at 11977.85,187.85 h60
  text "SILK" at 12114.31,188.2 h60
  text "Only 10 mil vias are tented , others are not tented." at 3631,169 h60
M11 Gerber Information:
  lines w8: -1754.15,-1692.32 4845.85,-1692.32 ; -1754.15,-1488.98 4847.85,-1488.98 ; -1754.15,-1285.65 -1754.15,-1895.65 2250.85,-1895.65 4847.85,-1895.65 4847.85,-1285.65 -1753.65,-1285.65 -1753.65,-1895.65 ; 710.85,-1895.65 710.85,-1285.65 ; 1977.85,-1488.98 1977.85,-1285.65 ; 2817.85,-1488.98 2817.85,-1285.65 ; 3439.85,-1902.15 3439.85,-1699.32
  text "BOARD #:" at 785.85,-1417.82 h60
  text ".PRJ_Number" at 1331.35,-1417.82 h60
  text "REV:" at 2175.85,-1417.82 h60
  text ".PCB_Rev" at 2467.35,-1417.82 h60
  text "SVN REV:" at 3013.85,-1417.82 h60
  text ".VersionControl_RevNumber" at 3519.85,-1417.82 h60
  text "ALL ARTWORK VIEWED FROM TOP SIDE" at -1691.65,-1423.82 h60
  text "LAYER NAME =" at -1693.15,-1607.15 h60
  text ".TID" at 1181,-1615 h60
  text "TID #:" at 774.85,-1621.82 h60
  text ".plot_File_Name" at -1701.15,-1806.15 h60
  text "GENERATED    :" at 787.85,-1826.49 h60
  text ".Print_Date" at 1657.35,-1826.49 h60
  text ".Print_Time" at 2386.35,-1826.49 h60
  text "TEXAS INSTRUMENTS" at 3650.85,-1826.49 h60
M12 Stackup:
  drawing of 295 lines, arcs and shapes, not listed
  text "Layer" at 3255.5,4180.5 h60
  text "Name" at 3665.41,4180.5 h60
  text "Material" at 4595.16,4180.5 h60
  text "Thickness" at 5454.92,4180.5 h60
  text "Constant" at 6104.76,4180.5 h60
  text "Board Layer Stack" at 6674.62,4180.5 h60
  text "1" at 3255.5,4060.5 h60
  text "Top Overlay" at 3665.41,4060.5 h60
  text "2" at 3255.5,3940.5 h60
  text "Top Solder" at 3665.41,3940.5 h60
  text "Solder Resist" at 4595.16,3940.5 h60
  text "0.40mil" at 5454.92,3940.5 h60
  text "3.5" at 6104.76,3940.5 h60
  text "3" at 3255.5,3820.5 h60
  text "Top Layer" at 3665.41,3820.5 h60
  text "Copper" at 4595.16,3820.5 h60
  text "2.80mil" at 5454.92,3820.5 h60
  text "4" at 3255.5,3700.5 h60
  text "Dielectric1" at 3665.41,3700.5 h60
  text "FR-4 High Tg" at 4595.16,3700.5 h60
  text "20.00mil" at 5454.92,3700.5 h60
  text "4.2" at 6104.76,3700.5 h60
  text "5" at 3255.5,3580.5 h60
  text "GND" at 3665.41,3580.5 h60
  text "Copper" at 4595.16,3580.5 h60
  text "2.80mil" at 5454.92,3580.5 h60
  text "6" at 3255.5,3460.5 h60
  text "Dielectric 3" at 3665.41,3460.5 h60
  text "FR-4 High Tg" at 4595.16,3460.5 h60
  text "12.00mil" at 5454.92,3460.5 h60
  text "4.2" at 6104.76,3460.5 h60
  text "7" at 3255.5,3340.5 h60
  text "PWR" at 3665.41,3340.5 h60
  text "Copper" at 4595.16,3340.5 h60
  text "2.80mil" at 5454.92,3340.5 h60
  text "8" at 3255.5,3220.5 h60
  text "Dielectric 2" at 3665.41,3220.5 h60
  text "FR-4 High Tg" at 4595.16,3220.5 h60
  text "20.00mil" at 5454.92,3220.5 h60
  text "4.2" at 6104.76,3220.5 h60
  text "9" at 3255.5,3100.5 h60
  text "Bottom Layer" at 3665.41,3100.5 h60
  text "Copper" at 4595.16,3100.5 h60
  text "2.80mil" at 5454.92,3100.5 h60
  text "10" at 3255.5,2980.5 h60
  text "Bottom Solder" at 3665.41,2980.5 h60
  text "Solder Resist" at 4595.16,2980.5 h60
  text "0.40mil" at 5454.92,2980.5 h60
  text "3.5" at 6104.76,2980.5 h60
  text "11" at 3255.5,2860.5 h60
  text "Bottom Overlay" at 3665.41,2860.5 h60
M13 Component Bodies Top:
  text ".Layer_Name" at -885.15,-1620.64 h60
M14 Component Bodies Bottom:
  text ".Layer_Name" at -885.15,-1620.64 h60
M15 Courtyards Top:
  text ".Layer_Name" at -885.15,-1620.64 h60
M16 Courtyards Bottom:
  text ".Layer_Name" at -885.15,-1620.64 h60
Drill Drawing:
  circle w10: c3322.62,2211.33 r33.33
  circle w10: c3322.62,1611.33 r20
  circle w10: c3322.62,1611.33 r33.33
  lines w10: 3289.29,1194.67 3355.96,1194.67 3322.62,1128 3289.29,1194.67 ; 3289.29,1311.33 3322.62,1278 3355.96,1311.33 3322.62,1344.67 3289.29,1311.33 ; 3289.29,1428 3355.96,1428 3355.96,1494.67 3289.29,1494.67 3289.29,1428 ; 3289.29,1744.67 3305.96,1744.67 3305.96,1728 3339.29,1728 3339.29,1744.67 3355.96,1744.67 3355.96,1778 3339.29,1778 3339.29,1794.67 3305.96,1794.67 3305.96,1778 3289.29,1778 3289.29,1744.67 ; 3289.29,1878 3355.96,1878 3355.96,1944.67 3289.29,1944.67 3289.29,1878 ; 3289.29,2028 3322.62,2044.67 3355.96,2028 3339.29,2061.33 3355.96,2094.67 3322.62,2078 3289.29,2094.67 3305.96,2061.33 3289.29,2028 ; 3289.29,2344.67 3305.96,2344.67 3305.96,2328 3339.29,2328 3339.29,2344.67 3355.96,2344.67 3355.96,2378 3339.29,2378 3339.29,2394.67 3305.96,2394.67 3305.96,2378 3289.29,2378 3289.29,2344.67 ; 3302.62,1441.33 3342.62,1441.33 3342.62,1481.33 3302.62,1481.33 3302.62,1441.33 ; 3302.62,2351.33 3312.62,2351.33 3312.62,2341.33 3332.62,2341.33 3332.62,2351.33 3342.62,2351.33 3342.62,2371.33 3332.62,2371.33 3332.62,2381.33 3312.62,2381.33 3312.62,2371.33 3302.62,2371.33 3302.62,2351.33
  lines w15: 3229.5,1083 7580.31,1083 ; 3229.5,2433 7580.31,2433 ; 3780.38,933 3780.38,2583 ; 4380.22,933 4380.22,2583 ; 5529.88,933 5529.88,2583 ; 6035.76,933 6035.76,2583 ; 3229.5,933 7580.31,933 7580.31,2583 3229.5,2583 3229.5,933
  text "Symbol" at 3319.5,2478 h72
  text "Count" at 3825.38,2478 h72
  text "Hole Size" at 4425.22,2478 h72
  text "Plated" at 5574.88,2478 h72
  text "Drill Layer Pair" at 6080.76,2478 h72
  text "14" at 3825.38,2328 h60
  text "7.87mil (0.200mm)" at 4425.22,2328 h60
  text "PTH" at 5574.88,2328 h60
  text "Top Layer - Bottom Layer" at 6080.76,2328 h60
  text "108" at 3825.38,2178 h60
  text "10.00mil (0.254mm)" at 4425.22,2178 h60
  text "PTH" at 5574.88,2178 h60
  text "Top Layer - Bottom Layer" at 6080.76,2178 h60
  text "476" at 3825.38,2028 h60
  text "12.00mil (0.305mm)" at 4425.22,2028 h60
  text "PTH" at 5574.88,2028 h60
  text "Top Layer - Bottom Layer" at 6080.76,2028 h60
  text "4" at 3825.38,1878 h60
  text "41.34mil (1.050mm)" at 4425.22,1878 h60
  text "PTH" at 5574.88,1878 h60
  text "Top Layer - Bottom Layer" at 6080.76,1878 h60
  text "8" at 3825.38,1728 h60
  text "43.31mil (1.100mm)" at 4425.22,1728 h60
  text "PTH" at 5574.88,1728 h60
  text "Top Layer - Bottom Layer" at 6080.76,1728 h60
  text "5" at 3825.38,1578 h60
  text "43.31mil (1.100mm)" at 4425.22,1578 h60
  text "PTH" at 5574.88,1578 h60
  text "Top Layer - Bottom Layer" at 6080.76,1578 h60
  text "22" at 3825.38,1428 h60
  text "45.28mil (1.150mm)" at 4425.22,1428 h60
  text "PTH" at 5574.88,1428 h60
  text "Top Layer - Bottom Layer" at 6080.76,1428 h60
  text "2" at 3825.38,1278 h60
  text "96.46mil (2.450mm)" at 4425.22,1278 h60
  text "NPTH" at 5574.88,1278 h60
  text "Top Layer - Bottom Layer" at 6080.76,1278 h60
  text "3" at 3825.38,1128 h60
  text "100.00mil (2.540mm)" at 4425.22,1128 h60
  text "PTH" at 5574.88,1128 h60
  text "Top Layer - Bottom Layer" at 6080.76,1128 h60
  text "642 Total" at 3825.38,978 h60
  text "FOR 7.874MIL DRILL +0/-7.874MIL" at 3349,805 h60
  text "FOR 10MIL DRILL +0/-10MIL" at 3347.23,714 h60
  text "FOR 10MIL DRILL +0/-10MIL" at 3347.23,623 h60
  text "FOR PTH DRILL +/-3MIL" at 3349,532 h60
  text "FOR NPTH DRILL +/-2MIL" at 3347.23,441 h60
  text ".layer_Name" at -780.15,-1604.15 h60

## Dimensions
0,0 to 0,2756 on M2 Board Dimensions
0,0 to 2716.54,0 on M2 Board Dimensions

## Text inside footprints (layer, text, board x,y; h text height)
C1: Top Overlay "+" at 710.38,1498.99 h60 r180; M5 Assembly Top "+" at 533.93,1542.49 h20 r180
C2: Top Overlay "+" at 713.62,2202.99 h60 r180; M5 Assembly Top "+" at 537,2226.49 h20 r180
Logo2: Top Overlay "Pb" at 2291.4,221.65 h60
Logo4: Bottom Overlay "For evaluation only; not FCC approved for resale." at 1923,198 h60
ZZ1: M5 Assembly Top "Install label in silkscreened box after final wash.  Text shall be 8 pt font.  Text shall be per the Label Table in the PDF schematic." at -50,3533 h20